# Altium PCB PCB1.PcbDoc
Units mil, origin at the board's own origin, x right, y up, seen from the top; angles counter-clockwise.
Board outline 2040 x 1510 mil, 6 copper layers (Top Layer, Mid Layer 1, Mid Layer 2, Mid Layer 3, Mid Layer 4, Bottom Layer), stack 47.126 mil thick; 24 components, 22 nets, 133 pads, 165 vias.
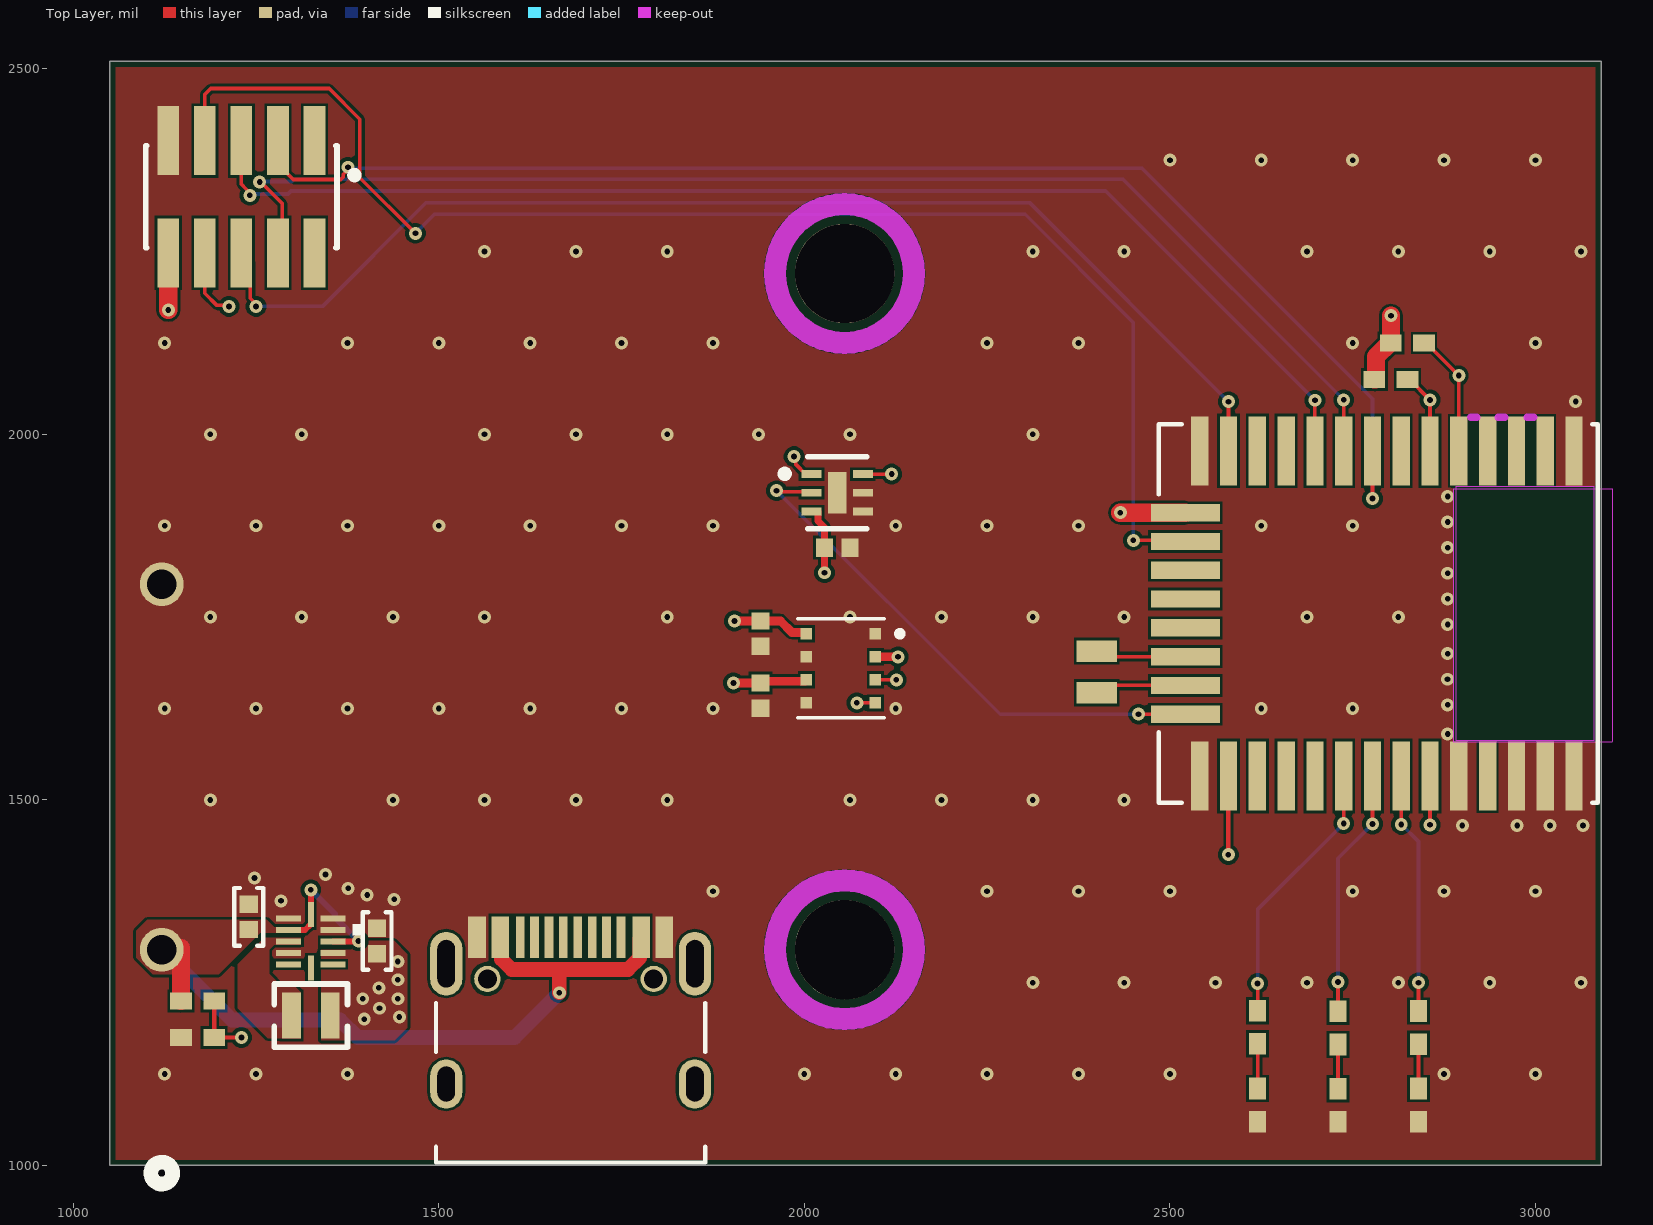
[diagram p0: Top Layer view]
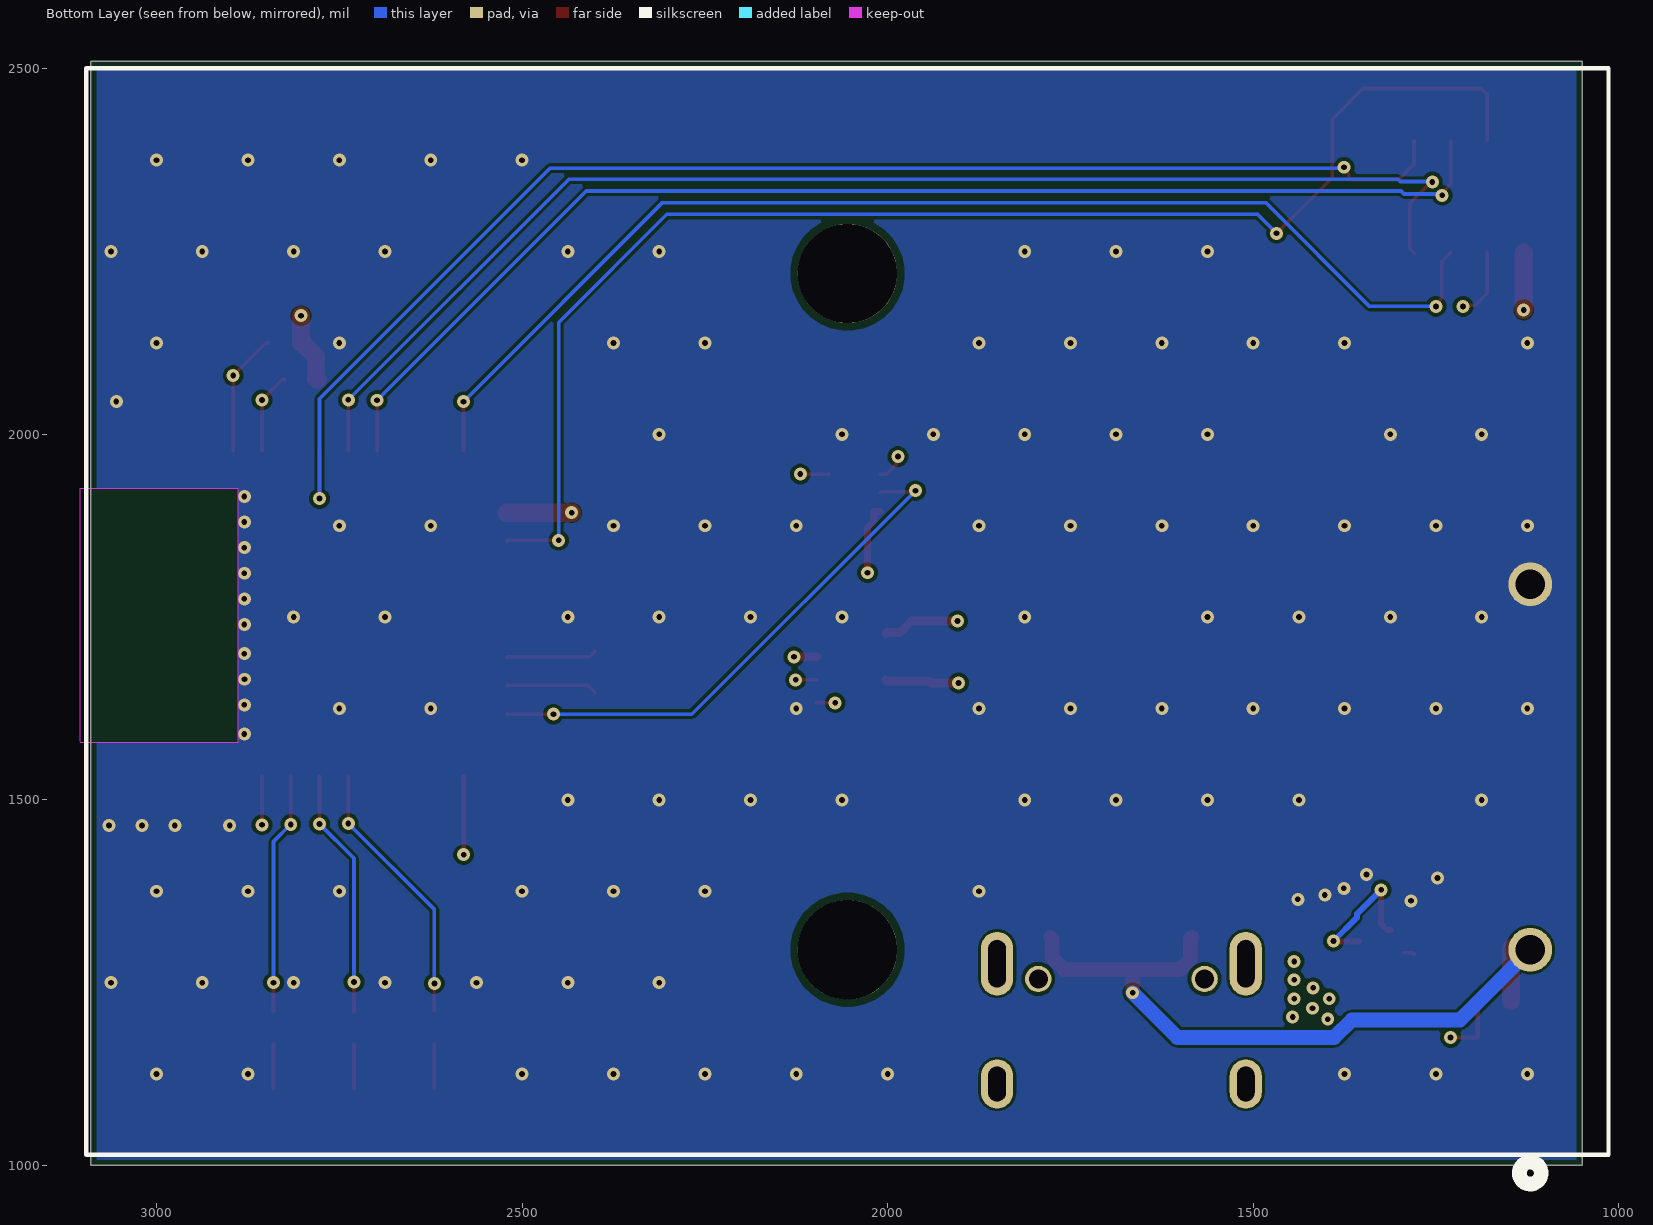
[diagram p1: Bottom Layer view, seen from below]
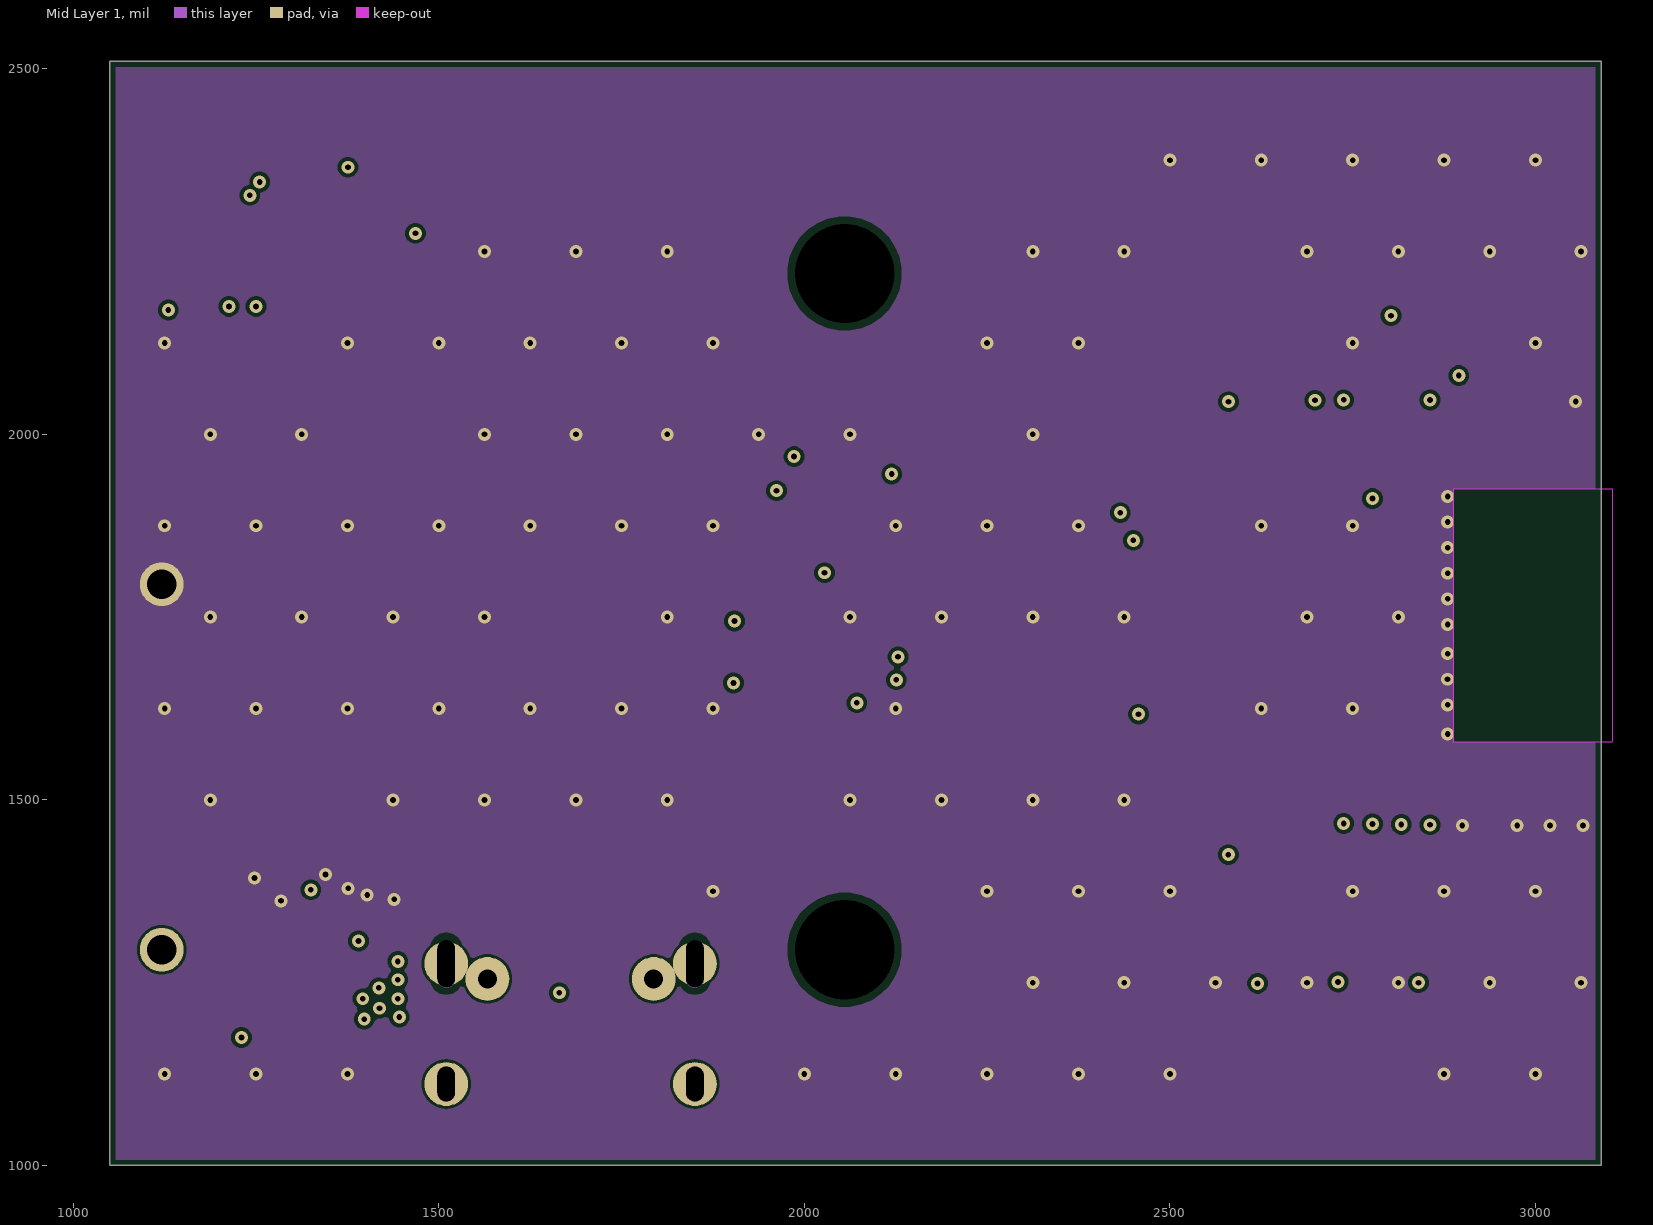
[diagram p2: Mid Layer 1]
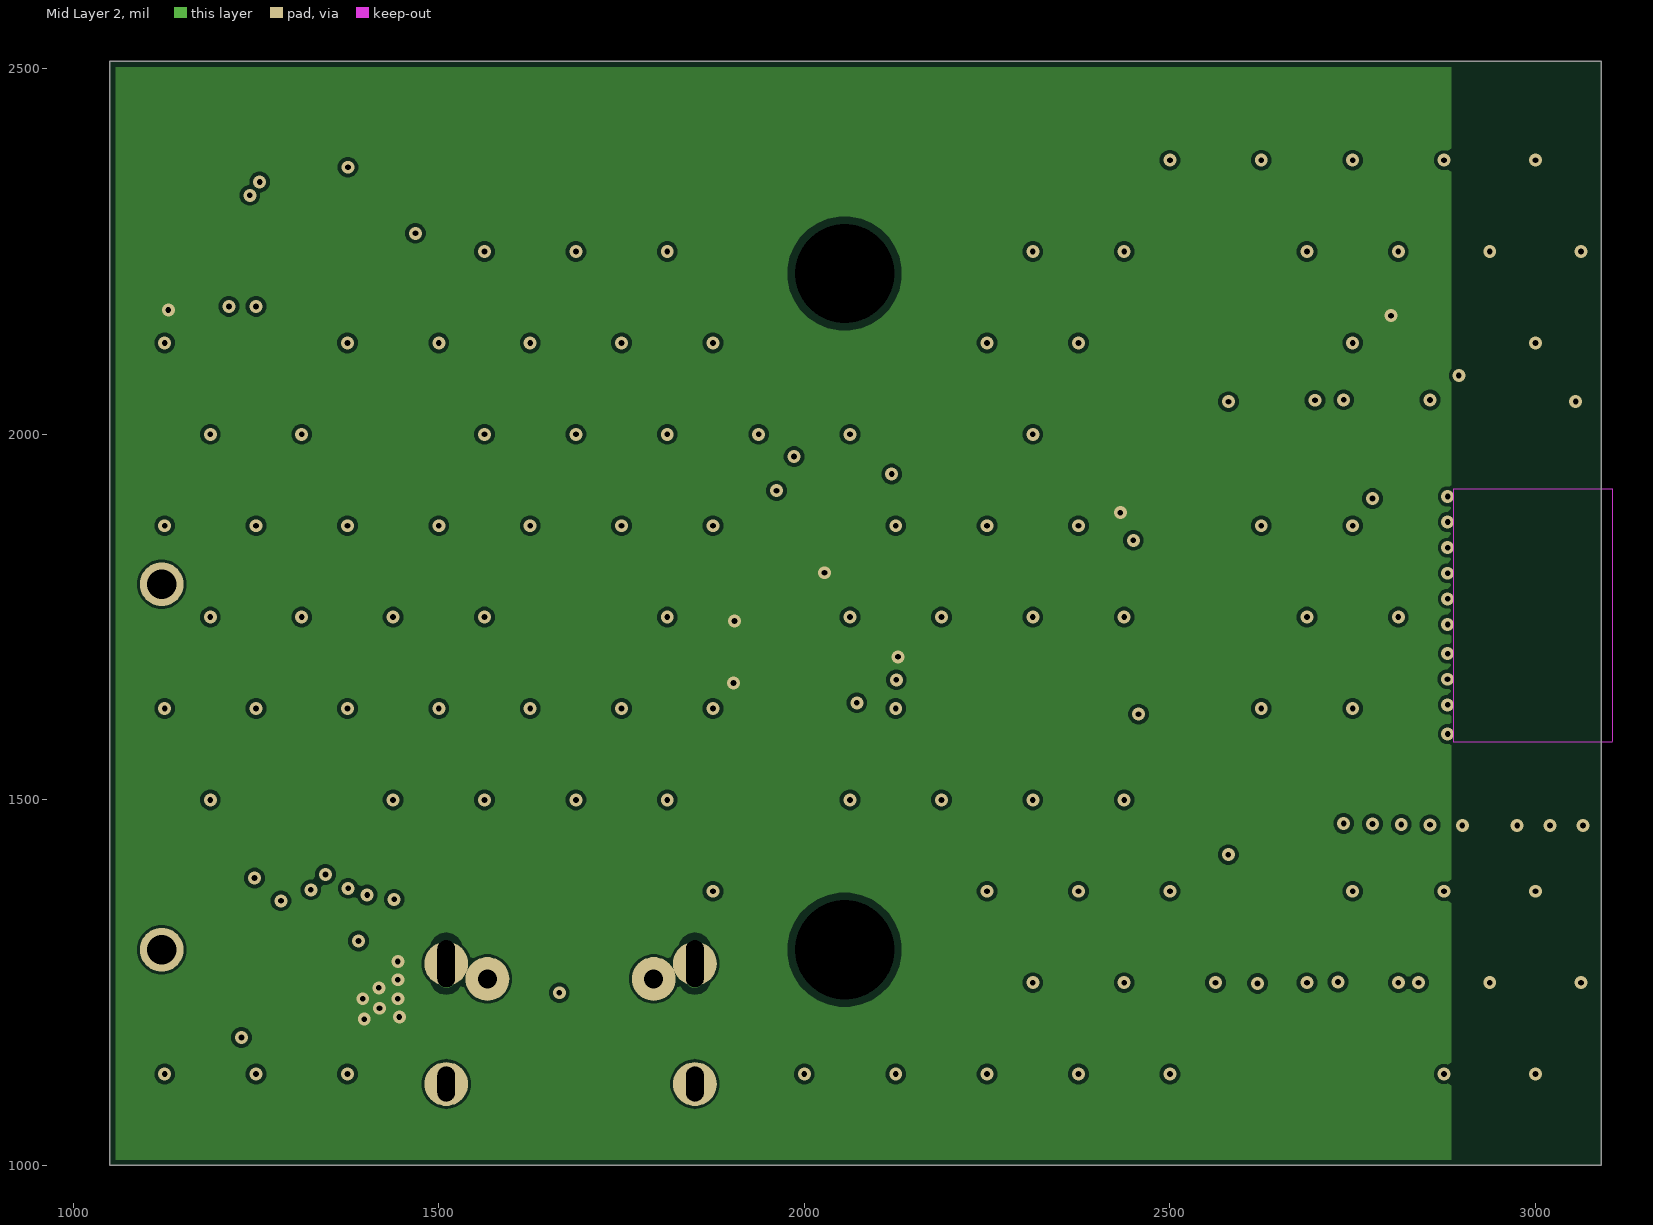
[diagram p3: Mid Layer 2]
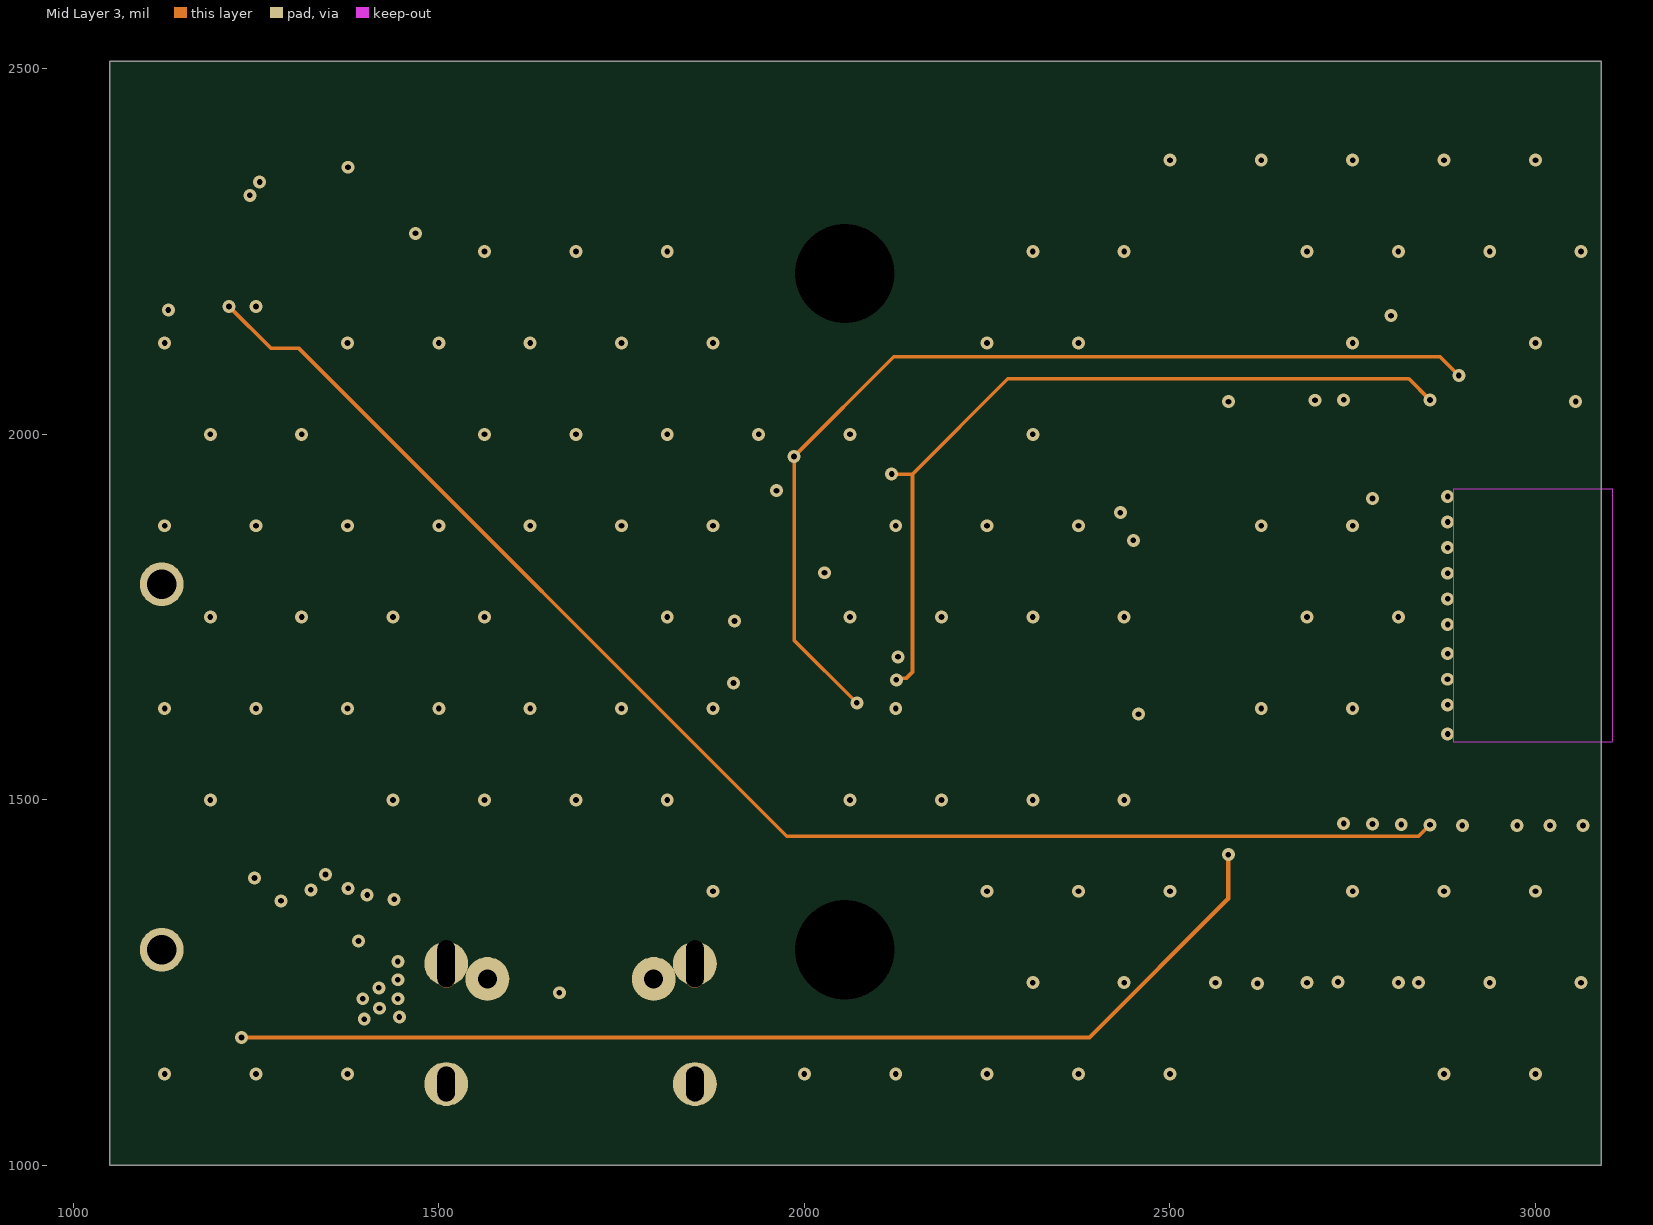
[diagram p4: Mid Layer 3]
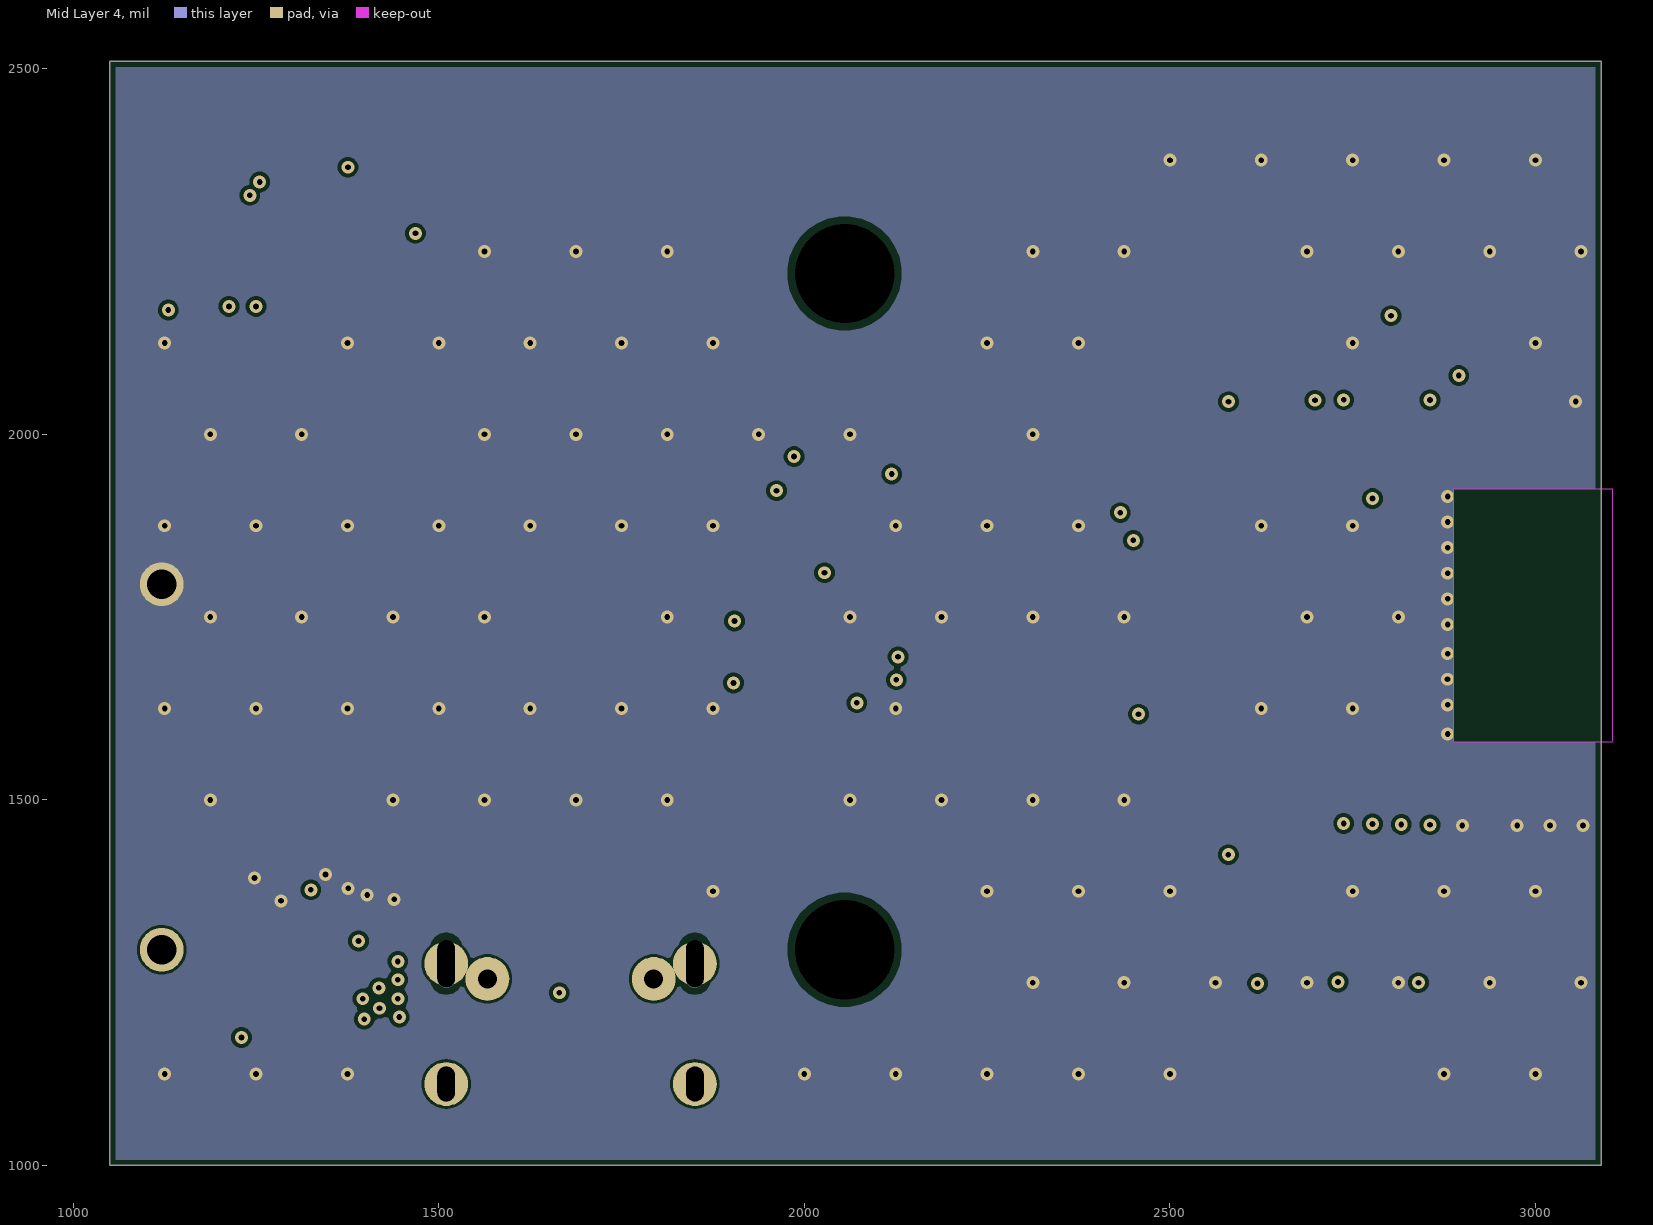
[diagram p5: Mid Layer 4]

## Layer stack, top to bottom
Top Solder: solder mask 0.5, Solder Resist, Dk 3.8
Top Layer: signal copper 1.378
Dielectric 1: prepreg 3.937, 2313, Dk 4.05
Mid Layer 1: signal copper 0.689
Core 1: core 14.3701, FR-4, Dk 4.5
Mid Layer 2: signal copper 0.689
Dielectric 2: prepreg 5, 2116, Dk 4.25
Mid Layer 3: signal copper 0.689
Core 2: core 14.3701, FR-4, Dk 4.5
Mid Layer 4: signal copper 0.689
Dielectric 3: prepreg 3.937, 2313, Dk 4.05
Bottom Layer: signal copper 1.378
Bottom Solder: solder mask 0.5, Solder Resist, Dk 3.8

## Board outline
1050,1000 3090,1000 3090,2510 1050,2510

## Design rules (kind name [scope] priority, off if disabled: settings)
BoardOutlineClearance [All] p1: gap=7.87 ignorepadtopadclearanceinfootprint=FALSE
Clearance Clearance_Keepout [IsKeepOut] p1: gap=0 ignorepadtopadclearanceinfootprint=FALSE
Clearance [All] p2: gap=3.5 ignorepadtopadclearanceinfootprint=FALSE except(5: Arc-Via Track-Via SMDPad-Via THPad-Via Via-Via Via-Fill Via-Poly Via-Region Via-Text; 9.84: Arc-Hole Track-Hole SMDPad-Hole THPad-Hole Via-Hole Fill-Hole Poly-Hole Region-Hole Text-Hole)
ComponentClearance [All] p1: gap=3.5 collisioncheckmode=3 verticalgap=3.5 showdistances=TRUE
DiffPairsRouting [All] p1: maxlimit=3.5 minlimit=3.5 mostfreqgap=3.5 toplayer_minwidth=3.5 toplayer_maxwidth=71497.94 toplayer_prefwidth=3.5 midlayer1_minwidth=3.5 midlayer1_maxwidth=71497.94 midlayer1_prefwidth=3.5 midlayer2_minwidth=3.5 midlayer2_maxwidth=71497.94 midlayer2_prefwidth=3.5 midlayer3_minwidth=3.5 midlayer3_maxwidth=71497.94 midlayer3_prefwidth=3.5 midlayer4_minwidth=3.5 midlayer4_maxwidth=71497.94 midlayer4_prefwidth=3.5 bottomlayer_minwidth=3.5 bottomlayer_maxwidth=71497.94 bottomlayer_prefwidth=3.5 maxuncoupledlength=500
Height [All] p1: minheight=0 maxheight=71497.94 prefheight=500
HoleSize [All] p1: absolutevalues=TRUE maxlimit=248.03 minlimit=7.87 maxpercent=80.000 minpercent=20.000
HoleToHoleClearance [All] p1: gap=9.84 allowstackedmicrovias=FALSE
MinimumAnnularRing [All] p1: minimumring=3
MinimumSolderMaskSliver [All] p1: minsoldermaskwidth=0
PlaneClearance [All] p1: clearance=3.5
PlaneConnect PlaneConnectPowerPads [InPadClass('PowerPads')] p1: planeconnectstyle=Direct reliefexpansion=20 reliefentries=4 reliefconductorwidth=10 reliefairgap=10
PlaneConnect [All] p2: planeconnectstyle=Direct reliefexpansion=11.81 reliefentries=4 reliefconductorwidth=3.5 reliefairgap=3.5
PolygonConnect PolygonConnectPowerPads [All vs (InPadClass('PowerPads'))] p1: connectstyle=Direct reliefconductorwidth=10 reliefentries=4 polygonreliefangle="90 Angle" airgapwidth=10
PolygonConnect [All] p2: connectstyle=Direct reliefconductorwidth=3.5 reliefentries=4 polygonreliefangle="90 Angle" airgapwidth=3.5
RoutingVias [All] p1: holewidth=7.87 width=17.72 viastyle="Through Hole" minholewidth=7.87 minwidth=17.72 maxholewidth=248.03 maxwidth=257.87
SilkToSilkClearance [All] p1: silktosilkclearance=0
SilkToSolderMaskClearance [IsPad] p1: minsilkscreentomaskgap=3.5 clearancetoexposedcopper=TRUE
SolderMaskExpansion SolderMaskExpansion_Via [IsVia] p1: expansion=2.95 istentingtop=TRUE
SolderMaskExpansion [All] p2: expansion=2.95 istentingtop=FALSE
Width [All] p1: maxlimit=71497.94 minlimit=3.5 preferedwidth=3.5
20 further rules are at their usual default settings.

## Classes and differential pairs
component class sensor: C5
component class supply: C1 C2 L1 U2

## Components (designator, comment, footprint, x,y, rotation, side; value= is the part's Value field where it differs from the comment)
C1 "" "CAP 0402_1005" 1240,1340 r90 top value="10 µF"
C2 "" "CAP 0402_1005" 1415.5,1307 r90 top value="10 µF"
C3 "" "CAP 0402_1005" 1940,1642.68 r90 top value="0.1 µF"
C4 "" "CAP 0402_1005" 2045,1845 r180 top value="0.1 µF"
C5 "" "CAP 0402_1005" 1940,1727.32 r90 top value="0.1 µF"
D1 "" "LED 0402_1005 YELLOW" 2620,1082.64 r270 top value=Yellow
D2 "" "LED 0402_1005 YELLOW" 2730,1082.36 r270 top value=Yellow
D3 "" "LED 0402_1005 YELLOW" 2840,1082.64 r270 top value=Yellow
J1 "" FP-62131021021-MFG 1230,2325 r180 top
J2 "" CONN12_C-31-M-12_HRO 1552.25,1312 r0 top
L1 "" "TDK VLS201612CX" 1325,1205 r180 top value="2.2 µH"
R1 "" "RES 0402_1005" 2825,2125 r0 top value="10 kOhms"
R2 "" "RES 0402_1005" 2802.36,2075 r0 top value="10 kOhms"
R3 "" "RES 0402_1005" 1170,1225 r0 top value="1.5 kOhms"
R4 "" "RES 0402_1005" 1170,1175 r180 top value="1.5 kOhms"
R5 "" "RES 0402_1005" 2620,1189 r90 top value="1.5 kOhms"
R6 "" "RES 0402_1005" 2730,1188 r90 top value="1.5 kOhms"
R7 "" "RES 0402_1005" 2840,1188.64 r90 top
U1 "" xGM240P 2785,1755 r270 top
U2 "" TQFN12_2X1P7_STM 1325,1306.5 r0 top
U3 "" 2479PCB_37P49X52P63_KEY 1121,1295 r90 bottom locked
U4 "" FP-UDFN-6L-DM00423052-MFG 2045,1920 r0 top
U5 "" IC_BME688 2050,1680 r0 top
Y1 "" FP-ABS06-MFG 2400,1675 r270 top

## Footprints (in the part's own frame and the unit in brackets; to place one, negate y for a bottom-side part, rotate by r counter-clockwise, add the part's x,y. Pads: shape width x height; smd on the part's side, far side on the other; paste and mask are expansions set on the pad)
2479PCB_37P49X52P63_KEY [mil]
  round 60 hole 40 paste-30 mask+0: 1(0,0) 2(500,0)
  round 136 / inner round 60 / far side round 136 hole 136 unplated paste-68 mask-68: 3(0,934) 4(925,934)
  silkscreen extent -320,-107 1206,1975
"CAP 0402_1005" [mm] "Chip Capacitor, 2-Leads, Body 1.02x0.51mm, IPC Medium Density"
  rect 0.6x0.64 smd: 1(-0.44,0) 2(0.44,0)
  silkscreen extent -1,-0.5 1,0.5, body extent -0.5,-0.26 0.5,0.26, height 0.52
CONN12_C-31-M-12_HRO [mil]
  oval 44x87 / inner round 60 / far side oval 44x87 hole 1 paste-43.5 mask+0: 13(-42.12,-36.06) 14(298.04,-36.06)
  oval 44x67 / inner round 60 / far side oval 44x67 hole 1 paste-33.5 mask+0: 15(-42.12,-200.63) 16(298.04,-200.63)
  round 36 / inner round 60 / far side round 36 hole 26 paste-18 mask-18: 17(14.18,-56.93) 18(241.74,-56.93)
  round 24 / inner round 60 / far side round 24 hole 24 slot 65 at 90 deg unplated paste-12 mask-12: 19(-42.12,-36.06) 21(298.04,-36.06)
  round 24 / inner round 60 / far side round 24 hole 24 slot 48 at 90 deg unplated paste-12 mask-12: 23(-42.12,-200.63) 25(298.04,-200.63)
  rect 24x57 smd paste-28.5: A1-B12(0,0) A4-B9(31.51,0)
  rect 12x57 smd paste-28.5: A5(78.75,0) A6(118.12,0) A7(137.81,0) A8(177.18,0) B5(196.87,0) B6(157.5,0) B7(98.43,0) B8(59.06,0)
  rect 24x57 smd: B1-A12(255.92,0) B4-A9(224.41,0)
  Multi-Layer lines w24: -42.12,-212.13 -42.12,-200.63 ; -42.12,-57.56 -42.12,-36.06 ; 298.04,-212.13 298.04,-200.63 ; 298.04,-57.56 298.04,-36.06
  silkscreen extent -56,-308 312,-90
FP-62131021021-MFG [mm]
  rect 0.75x2.4 smd paste+0 mask+0: 1(-2.54,-1.95) 2(-2.54,1.95) 3(-1.27,-1.95) 4(-1.27,1.95) 5(0,-1.95) 6(0,1.95) 7(1.27,-1.95) 8(1.27,1.95) 9(2.54,-1.95) 10(2.54,1.95)
  silkscreen extent -4.05,-1.78 3.32,1.78, body extent -3.42,-3.25 3.42,3.25, height 0.25
FP-ABS06-MFG [mm]
  rect 0.75x1.4 smd paste+0 mask+0: 1(-0.725,0) 2(0.725,0)
  body extent -1.2,-0.8 1.2,0.8, height 0.25
FP-UDFN-6L-DM00423052-MFG [mm]
  rect 0.7x0.27 smd paste+0 mask-1000: 1(-0.89,0.65) 2(-0.89,0) 3(-0.89,-0.65) 4(0.89,-0.65) 5(0.89,0) 6(0.89,0.65)
  rect 0.65x1.45 smd paste+0 mask-1000: 7(0,0)
  silkscreen extent -1.95,-1.25 1.02,1.25, body extent -1.34,-1.12 1.34,1.12, height 0.25
IC_BME688 [mm]
  rect 0.4x0.4 smd: 1(1.2,1.2) 2(1.2,0.4) 3(1.2,-0.4) 4(1.2,-1.2) 5(-1.2,-1.2) 6(-1.2,-0.4) 7(-1.2,0.4) 8(-1.2,1.2)
  silkscreen extent -1.5,-1.72 2.14,1.72
"LED 0402_1005 YELLOW" [mm] "Chip Diode, 2-Leads, Body 1.00x0.50mm, IPC Medium Density"
  rect 0.75x0.6 smd: 1(-0.575,0) 2(0.575,0)
  body extent -0.5,-0.25 0.5,0.25, height 0.21
"RES 0402_1005" [mm] "Chip Resistor, 2-Leads, Body 1.0x0.5mm, IPC Medium Density"
  rect 0.75x0.6 smd: 1(-0.575,0) 2(0.575,0)
  body extent -0.5,-0.25 0.5,0.25, height 0.35
"TDK VLS201612CX" [mm] "Inductor, 2-Leads, Body 2.00x1.60mm, IPC Medium Density"
  rect 0.65x1.6 smd: 1(-0.675,0) 2(0.675,0)
  silkscreen extent -1.27,-1.1 1.27,1.1, body extent -1,-0.8 1,0.8, height 1.2
TQFN12_2X1P7_STM [mil]
  rect 34x8 smd paste+0 mask+0: 1(-30.5,31.5) 2(-30.5,15.75) 3(-30.5,0) 4(-30.5,-15.75) 5(-30.5,-31.5) 7(30.5,-31.5) 8(30.5,-15.75) 9(30.5,0) 10(30.5,15.75) 11(30.5,31.5)
  rect 8x34 smd paste+0 mask+0: 6(0,-36.5) 12(0,36.5)
  silkscreen extent 58,8 68,23, body extent -36,-41 36,41, height 20
xGM240P [mm]
  rect 2.4x0.6 smd paste+0 mask+0: 1(-5.65,6.8) 2(-5.65,5.8) 3(-5.65,4.8) 4(-5.65,3.8) 5(-5.65,2.8) 6(-5.65,1.8) 7(-5.65,0.8) 8(-5.65,-0.2) 9(-5.65,-1.2) 10(-5.65,-2.2) 11(-5.65,-3.2) 12(-5.65,-4.2) 13(-5.65,-5.2) 14(-5.65,-6.2) 23(5.65,-6.2) 24(5.65,-5.2) 25(5.65,-4.2) 26(5.65,-3.2) 27(5.65,-2.2) 28(5.65,-1.2) 29(5.65,-0.2) 30(5.65,0.8) 31(5.65,1.8) 32(5.65,2.8) 33(5.65,3.8) 34(5.65,4.8) 35(5.65,5.8) 36(5.65,6.8)
  rect 0.6x2.4 smd paste+0 mask+0: 15(-3.5,-6.7) 16(-2.5,-6.7) 17(-1.5,-6.7) 18(-0.5,-6.7) 19(0.5,-6.7) 20(1.5,-6.7) 21(2.5,-6.7) 22(3.5,-6.7)
  Top Layer keep-out region: 4.4,2.7 4.4,7.5 -4.4,7.5 -4.4,2.7
  silkscreen extent -6.58,-7.63 6.58,7.63

## Part data
C1 C2 C3 C4 C5: library part C0402C104K7PAC7867, "CAP CER 0.1UF 4V X5R 0402", Capacitance="0.1 µF", Device Package="0402 (1005 Metric)", Manufacturer=KEMET, Operating Temperature="-55°C ~ 85°C", Supplier Part Number 1=399-14871-1-ND, Temperature Coefficient=X5R, Tolerance=±10%, Voltage - Rated=4V, Applications="Bypass, Decoupling", componentlink1description=Datasheet, componentlink1url=https://api.kemet.com/component-edge/download/datasheet/C0402C104K7PAC7867.pdf, ComponentLink2Description="DigiKey Link", ComponentLink2URL=https://www.digikey.com/en/products/detail/kemet/C0402C104K7PAC7867/7381987, lastupdated="1/9/2022 12:30:40 pm", Lifecycle Status=Active, Minimum Order=1, Mounting Type="Surface Mount, MLCC", Package / Case="0402 (1005 Metric)", packaging=TapeAndReel, Part Number=C0402C104K7PAC7867, Part Status=Active, partid=5603, price=0.01, series="SMD Comm X5R", Size / Dimension="0.039\" L x 0.020\" W (1.00mm x 0.50mm)", Supplier 1=DigiKey, Thickness (Max)="0.022\" (0.55mm)"
D1 D2 D3: library part BL-HKC37A-AV-TRB, "0402 YELLOW", Color=Yellow, Current - Test=20mA, Device Package="0402 (1005 Metric)", Lens Color=Colorless, Manufacturer="American Bright Optoelectronics Corporation", Millicandela Rating=120mcd, Supplier Device Package=0402, Supplier Part Number 1=BL-HKC37A-AV-TRBCT-ND, Voltage - Forward (Vf) (Typ)=2.2V, componentlink1description=Datasheet, componentlink1url=https://americanbrightled.com/pdffiles/smt/BL-HKC37A-AV-TRB.pdf, ComponentLink2Description="DigiKey Link", ComponentLink2URL=https://www.digikey.com/en/products/detail/american-bright-optoelectronics-corporation/BL-HKC37A-AV-TRB/9678171, Configuration=Standard, Height (Max)=0.45mm, lastupdated="11/9/2022 10:29:51 am", Lens Style="Rectangle with Flat Top", Lens Transparency=Clear, Lifecycle Status=Active, Minimum Order=1, Mounting Type="Surface Mount", Package / Case="0402 (1005 Metric)", packaging=TapeAndReel, Part Number=BL-HKC37A-AV-TRB, Part Status=Active, partid=1041, price=0.06, series=-, Size / Dimension="1.00mm L x 0.50mm W", Supplier 1=DigiKey, Viewing Angle=120°, Wavelength - Dominant=589nm, Wavelength - Peak=590nm
J1: library part CMP-1502-00938-2, "1.27mm SMT Straight Dual Pin Header WR-PHD", RoHS Compliant=Yes
J2: library part TYPE-C-31-M-12, "No Description Available", Mfr_Name="HRO Electronics", RefDes=RefDes, Type=Type
L1: library part VLS201612CX-6R8M-1, "FIXED IND 6.8UH 930MA 368MOHM SM", Current - Saturation=730mA, Current Rating (Amps)="930 mA", DC Resistance (DCR)="368mOhm Max", Device Package=Nonstandard, Inductance="6.8 µH", Inductance Frequency - Test="1 MHz", Manufacturer="TDK Corporation", Operating Temperature="-40°C ~ 105°C", Supplier Device Package=2016, Supplier Part Number 1=445-172966-1-ND, Tolerance=±20%, componentlink1description=Datasheet, componentlink1url=https://product.tdk.com/info/en/catalog/datasheets/inductor_commercial_power_vls201612cx-1_en.pdf?ref_disty=digikey, ComponentLink2Description="DigiKey Link", ComponentLink2URL=https://www.digikey.com/en/products/detail/tdk-corporation/VLS201612CX-6R8M-1/5169771, Height - Seated (Max)="0.047\" (1.20mm)", lastupdated="11/9/2022 10:31:03 am", Lifecycle Status=Active, Material - Core=Ferrite, Minimum Order=1, Mounting Type="Surface Mount", Package / Case=Nonstandard, packaging=TapeAndReel, Part Number=VLS201612CX-6R8M-1, Part Status=Active, partid=207, price=0.13, series=VLS-CX-1, Shielding=Shielded, Size / Dimension="0.079\" L x 0.063\" W (2.00mm x 1.60mm)", Supplier 1=DigiKey, Type="Drum Core, Wirewound"
R1 R2 R3 R4 R5 R6 R7: library part ERA-2VRW1501X, "RES 1.5K OHM 0.05% 1/10W 0402", Device Package="0402 (1005 Metric)", Manufacturer="Panasonic Electronic Components", Operating Temperature="-55°C ~ 155°C", Power (Watts)="0.1W, 1/10W", Ratings=AEC-Q200, Resistance="1.5 kOhms", Supplier Device Package=0402, Supplier Part Number 1=10-ERA-2VRW1501XCT-ND, Temperature Coefficient=±10ppm/°C, Tolerance=±0.05%, componentlink1description=Datasheet, componentlink1url=https://api.pim.na.industrial.panasonic.com/file_stream/main/fileversion/9152, ComponentLink2Description="DigiKey Link", ComponentLink2URL=https://www.digikey.com/en/products/detail/panasonic-electronic-components/ERA-2VRW1501X/12086957, Composition="Thin Film", Features="Anti-Sulfur, Automotive AEC-Q200", Height - Seated (Max)="0.016\" (0.40mm)", lastupdated="11/9/2022 9:53:08 am", Lifecycle Status=Active, Minimum Order=1, Number of Terminations=2, Package / Case="0402 (1005 Metric)", packaging=TapeAndReel, Part Number=ERA-2VRW1501X, Part Status=Active, partid=67400, price=0.24, series=ERA-2V, Size / Dimension="0.039\" L x 0.020\" W (1.00mm x 0.50mm)", Supplier 1=DigiKey
U1: library part MGM240PB32VNA3, "No Description Available", Mfr_Name="Silicon Labs", RefDes=RefDes, Type=Type
U2: library part ST1PS03A1QTR, "No Description Available", Mfr_Name=STMicroelectronics, RefDes=RefDes, Type=Type
U3: library part 2479, "No Description Available", Mfr_Name="Keystone Electronics", RefDes=RefDes, Type=Type
U4: library part CMP-12184-000002-1, "LOW-VOLTAGE, ULTRA-LOW-POWER, 0.", Manufacturer=STMicroelectronics, Manufacturer Part Number=STTS22HTR, Max Supply Voltage=3.6V, Min Supply Voltage=1.5V, Operating Supply Current=1.75-120uA, Package=UDFN-6L-DM00423052, Temperature="-40°C to +125°C", Temperature Range High=+125°C, Temperature Range Low=-40°C, Automotive=No, Category=IC, ComponentLink2Description=Datasheet, ComponentLink2URL=https://www.st.com/resource/en/datasheet/stts22h.pdf, Device Class L1=Sensors, Device Class L2="Temperature and Humidity Sensors", Device Class L3=unset, Digikey Description="LOW-VOLTAGE, ULTRA-LOW-POWER, 0.", Height=0.55mm, Interface=I2C,SMBus, Lead Free=Yes, Mouser Description="Low-voltage, ultra-low-power, 0.5 ï¿½C accuracy Iï¿½C/SMBus 3.0 temperature sensor", Octopart=https://octopart.com/stts22htr-stmicroelectronics-103417944, Resolution=16bits, RoHS=TRUE, Sensor Output=I2C,SMBus, Standoff Height=0mm
U5: library part BME688, "Gas sensor measuring relative humidity, barometric pressure, ambient temperature and gas (VOC)", Package=None, Availability=Unavailable, MP=BME688, price=None
Y1: library part CMP-27762-003430-2, "Crystal 32.768kHz ±10ppm (Tol) 9pF FUND 90kΩ 2-Pin Mini-CSMD T/R", Case/Package=CSMD, ESR (Equivalent Series Resistance)=90kR, Frequency=32.768kHz, Frequency Tolerance=10ppm, Load Capacitance=9pF, Max Operating Temperature=85°C, Min Operating Temperature=-40°C, Package Quantity=3000, Depth=1.2mm, Height=0.6mm, Length=2mm, Mount="Surface Mount", Number of Pins=2, packaging="Tape and Reel", Radiation Hardening=No, REACH SVHC="No SVHC", RoHS Compliant=Yes, series=ABS06, Series Resistance=90kR, Termination=SMD/SMT, Tolerance=10ppm, Width=1.2mm

## Via types
v1: diameter 17.72, hole 7.87, Top Layer to Bottom Layer, tented both sides, 165 vias

## Nets (pads, with @x,y where several pads share a name; then routed paths per layer and width w, separated by ;. In a path a pad name is that pad's centre, name@x,y a point inside that pad or via, vN(x,y) a via of type N, cw(c..) or ccw(c..) an arc to the next point about the centre after c; other vN are vias at no path point)
3v3: C2.1 C3.2 C4.2 C5.2 J1.10 L1.1 R1.1 R2.1 U1.15 U2.8 U4.3 U5.2 U5.6 U5.8 | length 600
  Top Layer w10: U4.3 2018.43,1894.41 2018.74,1894.09 2018.74,1881.54 2027.68,1872.6 C4.2 v1(2027.68,1810.68)
  Top Layer w12: v1(1903,1660) C3.2 1942.38,1662.38 2000.88,1662.38 U5.6 ; v1(1904.35,1744.65) C5.2 1967.35,1744.65 1982.88,1729.12 2000.88,1729.12 U5.8 ; U5.2 v1(2128.25,1695.75)
  Top Layer w25: v1(1130,2170) J1.10 ; v1(2432.2,1892.8) U1.15 ; R2.1 2781.3,2075 2781.99,2075.69 2781.99,2106.2 2800.79,2125 R1.1 v1(2802.36,2162.36)
  other v1: 1398,1200 1446,1203 1419,1215 1396,1228 1444,1228 1418,1243 1444,1254 1444,1279
GND: C1.2 C2.2 C3.1 C4.1 C5.1 D1.2 D2.2 D3.2 J1.9 J2.A1-B12 J2.B1-A12 R4.2 U1.1 U1.14 U1.23 U1.32 U1.34 U1.35 U1.36 U2.1 U2.4 U2.10 U2.11 U3.2 U4.4 U4.5 U4.7 U5.1 U5.5 U5.7 | length 15.1
  Top Layer w5: U2.4@1280,1289.25 1281.5,1290.75 U2.4
  other v1: 1125,1125 1250,1125 1375,1125 2000,1125 2125,1125 2250,1125 2375,1125 2500,1125 2875,1125 3000,1125 2312.5,1250 2437.5,1250 2562.5,1250 2687.5,1250 2812.5,1250 2937.5,1250 3062.5,1250 1284,1362 1439,1364 1402,1370 1875,1375 2250,1375 2375,1375 2500,1375 2750,1375 2875,1375 3000,1375 1376,1379 1248,1393 1345,1398 2900,1465 2975,1465 3020,1465 3065,1465 1187.5,1500 1437.5,1500 1562.5,1500 1687.5,1500 1812.5,1500 2062.5,1500 2187.5,1500 2312.5,1500 2437.5,1500 2880,1590 1125,1625 1250,1625 1375,1625 1500,1625 1625,1625 1750,1625 1875,1625 2125,1625 2625,1625 2750,1625 2880,1630 2879.61,1665.04 2880,1700 2880,1740 1187.5,1750 1312.5,1750 1437.5,1750 1562.5,1750 1812.5,1750 2062.5,1750 2187.5,1750 2312.5,1750 2437.5,1750 2687.5,1750 2812.5,1750 2880,1775 2880,1810 2880,1845 1125,1875 1250,1875 1375,1875 1500,1875 1625,1875 1750,1875 1875,1875 2125,1875 2250,1875 2375,1875 2625,1875 2750,1875 2880,1880 2880,1915 1187.5,2000 1312.5,2000 1562.5,2000 1687.5,2000 1812.5,2000 1937.5,2000 2062.5,2000 2312.5,2000 3055,2045 1125,2125 1375,2125 1500,2125 1625,2125 1750,2125 1875,2125 2250,2125 2375,2125 2750,2125 3000,2125 1562.5,2250 1687.5,2250 1812.5,2250 2312.5,2250 2437.5,2250 2687.5,2250 2812.5,2250 2937.5,2250 3062.5,2250 2500,2375 2625,2375 2750,2375 2875,2375 3000,2375
NetD1_1: D1.1 R5.1 | length 61.1
  Top Layer w5: D1.1 R5.1
NetD2_1: D2.1 R6.1 | length 60.4
  Top Layer w5: D2.1 R6.1
NetD3_1: D3.1 R7.1 | length 60.7
  Top Layer w5: D3.1 R7.1
NetL1_2: L1.2 U2.3
NetR1_2: R1.2 U1.5 U4.1 U5.4 | length 1582
  Top Layer w5: v1(1986,1969.55) 1988.43,1967.12 1988.43,1958.65 2001.5,1945.59 U4.1 ; v1(2071.76,1632.76) U5.4 ; R1.2 2850.59,2125 v1(2895.24,2080.35) U1.5
  Mid Layer 3 w5: v1(2071.76,1632.76) 1986,1718.51 v1(1986,1969.55) 2122.45,2106 2869.59,2106 v1(2895.24,2080.35)
NetR2_2: R2.2 U1.6 U4.6 U5.3 | length 1279.7
  Top Layer w5: U4.6 v1(2119.41,1945.59) ; U5.3 v1(2125.75,1664.25) ; R2.2 2827.95,2075 v1(2855.87,2047.09) U1.6
  Mid Layer 3 w5: v1(2119.41,1945.59) 2148,1945.59 ; v1(2125.75,1664.25) 2127.66,1666.16 2139.16,1666.16 2148,1675 2148,1945.59 ; v1(2855.87,2047.09) 2826.95,2076 2278.41,2076 2148,1945.59
NetR3_2: R3.2 R4.1 U1.24 | length 1683.7
  Top Layer w6: R3.2 R4.1 v1(1230,1175) ; v1(2580,1425) 2580,1532.28 U1.24
  Mid Layer 3 w6: v1(1230,1175) 2390,1175 2580,1365 v1(2580,1425)
NetR5_2: R5.2 U1.28 | length 369.7
  Top Layer w5: R5.2 v1(2620,1249) ; v1(2737.76,1467.76) U1.28
  Bottom Layer w5: v1(2620,1249) 2620,1350 v1(2737.76,1467.76)
NetR6_2: R6.2 U1.29 | length 341.4
  Top Layer w5: R6.2 v1(2730,1251) ; v1(2777.13,1467.13) U1.29
  Bottom Layer w5: v1(2730,1251) 2730,1420 v1(2777.13,1467.13)
NetR7_2: R7.2 U1.30 | length 331
  Top Layer w5: v1(2816.5,1466.5) U1.30 ; R7.2 v1(2840,1250)
  Bottom Layer w5: v1(2816.5,1466.5) 2840,1442.99 v1(2840,1250)
NetU1_20: U1.20 Y1.1 | length 124.4
  Top Layer w5: Y1.1 2407.6,1695.94 U1.20
NetU1_21: U1.21 Y1.2 | length 125.4
  Top Layer w5: Y1.2 2410.12,1656.57 U1.21
NetU1_22: U1.22 U4.2 | length 735.1
  Top Layer w5: v1(1962,1923) 1963.5,1921.5 2008.46,1921.5 U4.2 ; v1(2457.2,1617.2) U1.22
  Bottom Layer w5: v1(1962,1923) 2267.8,1617.2 v1(2457.2,1617.2)
nRST: J1.8 U1.31 | length 2112
  Top Layer w5: J1.8 1180,2193 1196.64,2176.36 1211.64,2176.36 v1(1213,2175) ; v1(2855.87,1465.87) U1.31
  Mid Layer 3 w5: v1(1213,2175) 1270,2118 1308,2118 1975.86,1450.14 2840.14,1450.14 v1(2855.87,1465.87)
RX: J1.7 U1.16 | length 1907.4
  Top Layer w5: J1.7 1180,2465 1188,2473 1350,2473 1392,2431 1392,2351 v1(1468,2275) ; v1(2450,1855) 2519.65,1855 U1.16
  Bottom Layer w5: v1(1468,2275) 1494,2301 2302,2301 2450,2153 v1(2450,1855)
SWDCLK: J1.3 U1.8 | length 1882.4
  Top Layer w5: J1.3 1280,2369.29 1300.76,2348.53 1365.8,2348.53 1369.34,2352.06 1369.34,2355.61 1375.64,2361.92 v1(1375.64,2365.36) ; v1(2777.13,1912.13) U1.8
  Bottom Layer w5: v1(1375.64,2365.36) 1377,2364 2462,2364 2777.13,2048.87 v1(2777.13,1912.13)
SWDIO: J1.4 U1.9 | length 1792.3
  Top Layer w5: v1(1255,2345.19) 1256.48,2345.19 1286,2315.67 1286,2254.23 J1.4 ; U1.9 v1(2737.76,2047.24)
  Bottom Layer w5: v1(1255,2345.19) 1255.74,2345.93 1298.93,2345.93 1302,2349 2436,2349 v1(2737.76,2047.24)
SWO: J1.5 U1.10 | length 1726.7
  Top Layer w5: J1.5 1230,2342 1236.7,2335.3 1236.7,2335.15 1241.47,2330.38 v1(1241.47,2326.94) ; U1.10 v1(2698.39,2046.61)
  Bottom Layer w5: v1(1241.47,2326.94) 1243.36,2328.83 1293.85,2328.83 1297.9,2332.88 2412.12,2332.88 v1(2698.39,2046.61)
TX: J1.6 U1.13 | length 1650.7
  Top Layer w5: J1.6 1242.26,2235.96 1242.26,2186.18 1250,2178.44 v1(1250,2175) ; U1.13 v1(2580.28,2044.72)
  Bottom Layer w5: v1(1250,2175) 1341,2175 1483,2317 2308,2317 v1(2580.28,2044.72)
Vbat: C1.1 J2.A4-B9 J2.B4-A9 R3.1 U2.2 U2.9 U2.12 U3.1 | length 1179.2
  Top Layer w8: 1312,1322 1317,1322 1325,1330 U2.12 v1(1325,1377) ; U2.9 1389.69,1306.5 v1(1390.19,1307)
  Top Layer w20: J2.A4-B9 1585.76,1310 1585.76,1282.19 1599.95,1268 1664.82,1268 ; v1(1664.82,1236.18) 1664.82,1268 ; J2.B4-A9 1774.67,1310 1774.67,1283.96 1758.71,1268 1664.82,1268
  Top Layer w25: R3.1 U3.1@1147.36,1297.36
  Bottom Layer w8: v1(1325,1377) 1358.25,1343.75 1358.25,1338.94 v1(1390.19,1307)
  Bottom Layer w20: U3.1 1217.14,1198.86 1365.4,1198.86 1389.26,1175 1603.64,1175 v1(1664.82,1236.18)
pads on no net: J1.1 J1.2 J2.13 J2.14 J2.15 J2.16 J2.17 J2.18 J2.19 J2.21 J2.23 J2.25 J2.A5 J2.A6 J2.A7 J2.A8 J2.B5 J2.B6 J2.B7 J2.B8 U1.2 U1.3 U1.4 U1.7 U1.11 U1.12 U1.17 U1.18 U1.19 U1.25 U1.26 U1.27 U1.33 U2.5 U2.6 U2.7 U3.3 U3.4

## Polygon pours and split planes (outlines as drawn)
GND on Top Layer "NONET_L01_P-001" (solid, pour order 12): 1000,2515 3110,2515 3110,1000 1005,1000 1005,2510
3v3 on Top Layer "NONET_L01_P-001" (solid, pour order 11): 1339,1295 1380,1295 1392,1307 1439,1307 1457,1289 1457,1188 1440,1171 1339,1171 1339,1176
NetL1_2 on Top Layer "NONET_L01_P-001" (solid, pour order 10): 1311,1174 1266,1174 1225,1215 1225,1275 1261.12,1311.12 1311.31,1311.12 1311.31,1302.31 1311,1302 1275,1302 1268,1295 1268,1262 1285,1245 1303,1245 1311,1237
Vbat on Top Layer "NONET_L01_P-001" (solid, pour order 3): 1086,1321 1101,1336 1265,1336 1275,1326 1312,1326 1312,1318 1256,1318 1199.18,1261.18 1108.82,1261.18 1086,1284
GND on Bottom Layer "NONET_L01_P-001" (solid, pour order 4): 1000,2512.5 3110,2512.5 3110,997.5 1005,997.5 1005,2507.5
GND on Mid Layer 4 "NONET_L01_P-001" (solid, pour order 5): 995,2512.5 3105,2512.5 3105,997.5 1000,997.5 1000,2507.5
GND on Mid Layer 1 "NONET_L01_P-001" (solid, pour order 7): 997.5,2520 3107.5,2520 3107.5,1005 1002.5,1005 1002.5,2515
3v3 on Mid Layer 2 "NONET_L01_P-001" (solid, pour order 8): 2885,1935 2885,2505 2880,2510 1000,2510 1000,1005 1005,1000 1010,1005 2885,1005

## Keep-outs
Top Layer:
  circle w30: c2055,1295 r94.87
  circle w30: c2055,2220 r94.87
  lines w10: 2911.07,2023.51 2919.82,2023.51 ; 2949.18,2023.43 2957.93,2023.43 ; 2989.03,2023.25 2997.78,2023.25
Keep-Out Layer:
  region: 3105,1580 3104.09,1579.09 2888.62,1579.09 2888.62,1925.59 3105,1925.59

## Silkscreen, mask and mechanical layers (free items; w line width, h text height)
Top Overlay:
Top Solder:
  text "GasSentinel" at 1753,2368.44 h120